# Altium PCB PCB1.PcbDoc (part 2 of 3)
Units mil, origin at the board's own origin, x right, y up, seen from the top; angles counter-clockwise.
Board outline 3051.58 x 3543.22 mil, 2 copper layers (Top Layer, Bottom Layer), stack 22.441 mil thick; 24 components, 24 nets, 64 pads, 1 vias.
Unrouted connection lines stored in the file: 1.
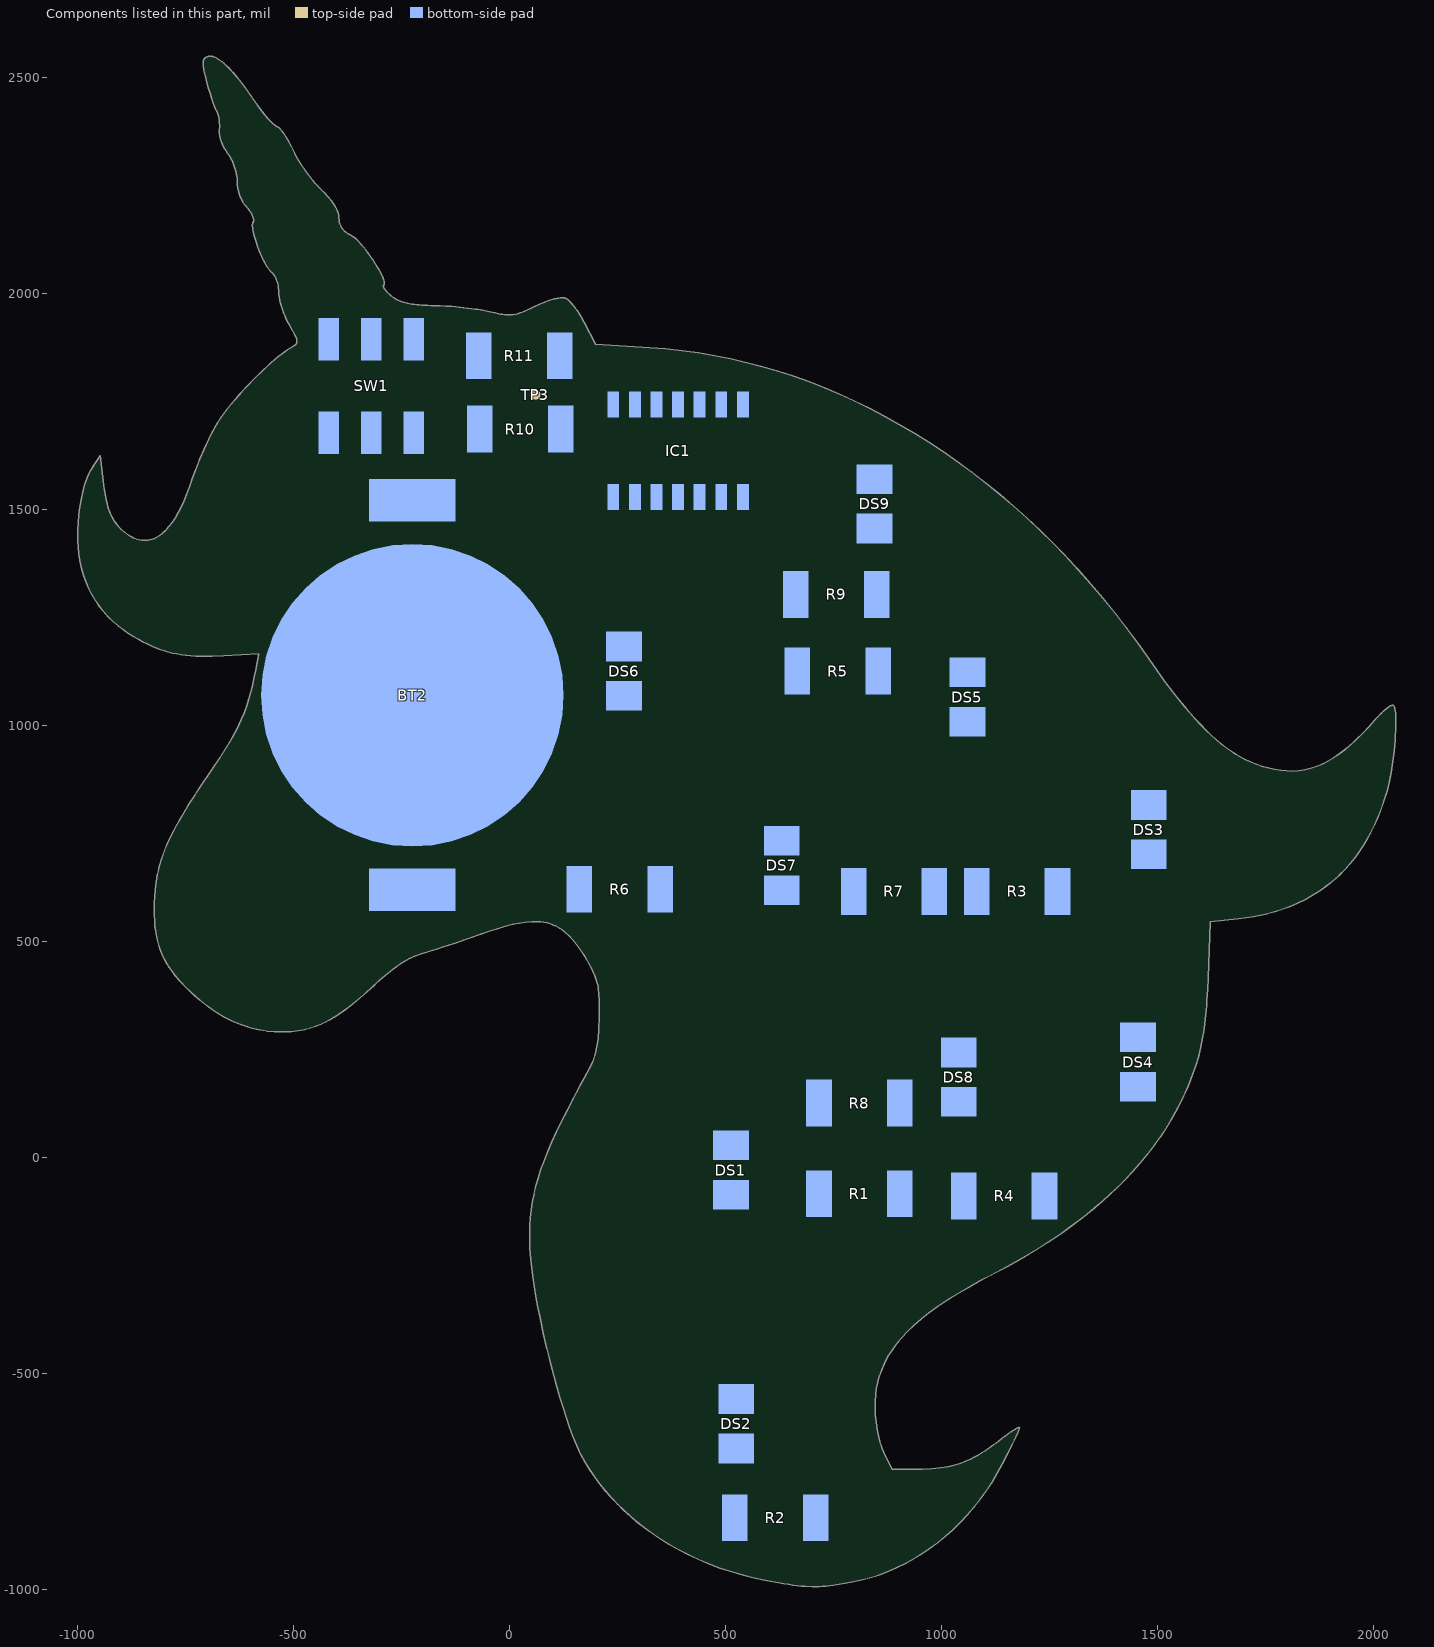
[diagram p2: the components of this part, seen from the top]

## Keep-outs (continued)
Keep-Out Layer: (continued)
  lines w5: -1022.12,1451.07 cw(c-559.53,1440.1) -1014.11,1526.52 ; -1022.12,1451.09 ccw(c-594.89,1440.62) -1021.99,1425.78 ; -1021.99,1425.72 cw(c-594.89,1440.62) -1021.99,1425.78 ; -1021.99,1425.83 ccw(c-699.74,1435.47) -1021.99,1425.78 ; -1011.57,1354.18 cw(c-699.04,1437.68) -1011.6,1354.28 ; -1008.84,1549.87 cw(c-732.99,1478.26) -1002.32,1571.42 ; -1008.83,1549.89 ccw(c-652.64,1457.14) -1014.1,1526.57 ; -1002.3,1571.49 ccw(c-732.99,1478.26) -1002.32,1571.42 ; -994.43,1590.94 cw(c-875.55,1535.81) -994.4,1591.01 ; -945.61,1235.41 cw(c-750.75,1421.33) -1011.6,1354.28 ; -945.51,1235.3 ccw(c-737.38,1436.47) -891.42,1191.41 ; -913.08,1532.36 cw(c-496.04,1611.68) -913.09,1532.41 ; -913.09,1532.45 ccw(c-681.6,1577.41) -913.09,1532.41 ; -897.83,1487.47 ccw(c-826.35,1529.77) -897.8,1487.42 ; -897.76,1487.36 cw(c-817.86,1534.02) -897.8,1487.42 ; -891.47,1191.44 ccw(c-627.19,1607.05) -891.42,1191.41 ; -891.37,1191.37 cw(c-737.38,1436.47) -891.42,1191.41 ; -849.53,1167.75 ccw(c-718.48,1432.89) -849.47,1167.72 ; -843.69,604.28 cw(c-410.51,578.85) -843.69,604.38 ; -843.68,604.47 ccw(c-284.68,566.89) -843.69,604.38 ; -841.6,519.44 ccw(c-619.51,550.17) -841.58,519.34 ; -841.57,519.27 cw(c-540.21,563.31) -841.58,519.34 ; -811.64,737.33 cw(c-331.32,520.03) -811.62,737.37 ; -811.58,737.47 ccw(c-495.86,591.97) -811.62,737.37 ; -780.52,1514.94 ccw(c-1155.89,1697.89) -780.48,1515.03 ; -752.74,364.92 ccw(c-413.55,727.02) -752.68,364.87 ; -752.6,364.79 cw(c-480.25,660.34) -752.68,364.87 ; -744.16,1608.67 cw(c14.63,1311.1) -737.72,1624.6 ; -744.15,1608.7 ccw(c-150.62,1374.93) -755.4,1577.81 ; -735.61,868.1 -735.58,868.14 ; -731.96,2533.57 cw(c-686.9,2532.71) -730.88,2542.53 ; -731.96,2533.63 ccw(c-663.96,2532.16) -731.61,2525.14 ; -731.6,2525.1 cw(c-663.96,2532.16) -731.61,2525.14 ; -730.38,2516.36 ccw(c-510.81,2555.37) -728.42,2506.59 ccw(c-706.46,2511.52) -728.4,2506.52 ccw(c-100.56,2649.39) -722.42,2482.4 ; -730.37,2516.33 cw(c-614.23,2537.13) -731.61,2525.14 ; -727.3,2551.98 ccw(c-696.1,2534.75) -730.85,2542.66 ; -727.02,2552.47 cw(c-696.89,2534.82) -713.24,2565.68 cw(c-689.08,2521.22) -706.78,2568.62 cw(c-698.91,2547.54) -705.84,2568.95 cw(c-692.6,2528.07) -676.46,2567.89 cw(c-701.84,2499.84) -664.4,2562.07 ; -722.43,2482.44 ccw(c-41.93,2662.29) -722.42,2482.4 ; -722.41,2482.36 cw(c-100.56,2649.39) -722.42,2482.4 ; -695.19,2402.61 cw(c-771.52,2388.04) -695.18,2402.56 ; -695.17,2402.52 ccw(c-743.6,2393.05) -695.18,2402.56 ; -688.14,1722.4 ccw(c-479.08,1582.02) -694.95,1711.69 ccw(c-360.11,1510.21) -701.96,1699.55 ccw(c-225.24,1435.27) -709.16,1686.13 ccw(c-94.69,1367.42) -716.41,1671.74 ; -688,1722.61 cw(c-289.07,1448.15) -659.61,1759.88 ; -685.83,2336.8 cw(c-569.06,2385.4) -690.87,2351.36 cw(c-669.2,2357.41) -690.88,2351.37 cw(c-585.14,2380.83) -692.66,2358.74 cw(c-601.09,2377.59) -693.87,2366.12 cw(c-618.21,2375.51) -694.43,2373.57 cw(c-634.09,2375.15) -694.15,2381.1 ; -685.85,2336.84 ccw(c-568.14,2385.56) -679.02,2322.83 ; -679.03,2322.85 ccw(c-587.34,2374.47) -679.02,2322.83 ; -679,2322.81 cw(c-568.14,2385.56) -679.02,2322.83 ; -674.28,960.62 cw(c-1763.43,1637.33) -674.32,960.57 ; -670.36,2309.83 cw(c-587.34,2374.47) -670.41,2309.89 ; -664.42,2562.08 cw(c-722.57,2464.88) -664.4,2562.07 ; -664.36,2562.05 ccw(c-701.84,2499.84) -664.4,2562.07 ; -660.46,1137.52 cw(c-700.61,1786.18) -660.54,1137.52 ; -659.64,1759.84 cw(c-44.61,1248.03) -659.61,1759.88 ; -659.56,1759.94 ccw(c-289.07,1448.15) -659.61,1759.88 ; -654.97,2274.32 ccw(c-761.01,2250.75) -654.99,2274.4 ; -652.46,2553.84 cw(c-760.37,2416.53) -652.4,2553.8 ; -645.68,2218.45 cw(c-533.15,2259.99) -645.69,2218.49 ; -645.71,2218.54 ccw(c-536.25,2258.42) -645.69,2218.49 ; -641.52,1021.76 cw(c-1006,1182.28) -641.55,1021.69 ; -640.42,2543.47 ccw(c-760.37,2416.53) -640.48,2543.52 ; -634.99,2196.67 ccw(c-559.24,2244.66) -625.2,2183.92 ; -634.95,2196.6 cw(c-546.66,2252.98) -639.04,2203.6 ; -624.25,1799.72 cw(c82.93,1134.93) -624.2,1799.77 ; -618.43,2175.14 cw(c-654.64,2152.63) -618.4,2175.1 ; -616.74,2144.66 ccw(c-464.65,2167.84) -616.73,2144.57 ; -616.71,2144.47 cw(c-541.67,2156.55) -616.73,2144.57 ; -613.83,2130.22 ccw(c-369.48,2191.28) -613.82,2130.18 ; -613.82,2130.17 cw(c-464.65,2167.84) -613.82,2130.18 ; -597.3,2082.4 cw(c-278.65,2220.33) -609.42,2114.7 ; -597.32,2082.43 ccw(c-311.56,2205.67) -590.12,2066.92 ; -590.13,2066.94 ccw(c-389.28,2166.67) -582.61,2053.05 ccw(c-501.29,2097.72) -565.19,2030.46 ; -559.97,2020.9 ccw(c-606.7,2004.81) -559.99,2020.95 ; -556.64,2001.68 ccw(c-476.31,2002.08) -556.64,2001.61 ; -556.2,1993.71 cw(c-476.31,2002.08) -556.64,2001.61 ; -556.21,1993.74 ccw(c-440.62,2005.68) -555.08,1985.63 ccw(c-399.8,2012.72) -553.4,1977.34 ; -553.39,1977.27 cw(c-399.8,2012.72) -553.4,1977.34 ; -551.18,1968.58 ccw(c-304.6,2037.82) -551.16,1968.51 ; -549.93,1870.19 cw(c-340.55,1614.57) -549.88,1870.23 ; -538.32,1933.09 ccw(c-345.97,2018.87) -538.31,1933.07 ; -535.26,2411.35 ccw(c-483.75,2463.58) -535.2,2411.29 ; -533.62,1882.72 cw(c-436.25,1748.45) -533.57,1882.76 ; -527.42,267.09 cw(c-528,561.62) -527.48,267.09 ; -523.51,1904.83 -523.56,1904.92 ; -518.82,1896.12 cw(c-619.53,1843.32) -518.78,1896.04 ; -504.2,267.95 ccw(c-520.23,496.82) -504.13,267.95 ; -504.08,267.96 cw(c-526.98,571.51) -504.13,267.95 ; -502.28,2379.69 cw(c-672.93,2262) -497.49,2372.43 cw(c-702.59,2243.25) -492.79,2364.65 ; -502.27,2379.68 ccw(c-638.65,2285.71) -507.11,2386.34 ccw(c-604.22,2312.14) -511.97,2392.31 ; -479.73,2339 ccw(c-318.54,2411.57) -479.71,2338.95 ; -479.68,2338.88 ccw(c-726.26,2229.62) -479.71,2338.95 ; -433.72,2269.95 cw(c-166.24,2500.78) -433.78,2270.01 ; -421.02,2256.53 cw(c-610.51,2056.54) -420.98,2256.5 ; -420.96,2256.48 cw(c-304.35,2378.66) -420.98,2256.5 ; -381.93,2207.83 cw(c-472.07,2159.94) -381.9,2207.76 ; -378.05,2199.67 ccw(c-472.07,2159.94) -381.9,2207.76 ; -378.05,2199.68 cw(c-454.08,2167.51) -375.05,2191.36 ; -375.05,2191.38 cw(c-439.48,2171.89) -373.06,2182.8 ; -371.79,2168.46 ccw(c-355.36,2172.01) -371.78,2168.42 ; -371.77,2168.37 cw(c-347.25,2173.56) -371.78,2168.42 ; -320.79,2121.07 cw(c-600.68,1890.67) -308.63,2105.45 cw(c-326.75,2092.11) -308.61,2105.42 ; -320.77,2121.05 ccw(c-518.1,1959.08) -332.79,2134.68 ccw(c-404.69,2071.19) -357.83,2154.88 ccw(c-368.83,2135.25) -359.52,2155.74 cw(c-343.15,2191.79) -362.68,2157.34 ; -308.65,2105.48 cw(c-628.68,1869.27) -308.61,2105.42 ; -299,380.4 cw(c-918.63,1040.18) -299.04,380.36 ; -285.87,392.33 cw(c103.09,-46.18) -285.82,392.37 ; -278.02,2056.57 cw(c-407.85,1990.43) -277.98,2056.5 ; -266.87,2017.6 ccw(c-218.16,2064.05) -266.82,2017.54 ; -238.68,2000.23 ccw(c-210.29,2098.53) -238.59,2000.2 ; -194.48,450.18 ccw(c-164.36,338.04) -194.49,450.17 ; -146.24,1992.61 cw(c-192.89,1208.18) -132.06,1991.64 ; -146.2,1992.61 ccw(c-182.73,1392.65) -173.07,1993.65 ; -132.08,1991.64 cw(c-195.33,1168.15) -76.05,1985.41 cw(c-79.3,1963.15) -76.01,1985.4 cw(c-158.47,1428.39) -63.36,1983.38 cw(c-132.48,1579.33) -51.71,1981.22 cw(c-104.53,1717.59) -41.21,1978.9 ; -17.15,1973.57 ccw(c4.77,2093.73) -17.09,1973.56 ; -17,1973.54 cw(c58.34,2371.55) -17.09,1973.56 ; 10.01,1973.28 ccw(c-7.42,2045.1) 16.9,1975.31 ccw(c-27.98,2104.05) 25.4,1978.6 ; 10.04,1973.29 cw(c-1.76,2022.19) 4.2,1972.24 ; 26.46,-238.55 cw(c652.81,-183.06) 26.45,-238.47 cw(c652.81,-183.06) 24.49,-158.35 cw(c46.98,-159.24) 24.5,-158.23 cw(c489.99,-179.05) 27.81,-119.82 ; 26.45,-238.48 ccw(c745.32,-177.08) 31.14,-279.47 ; 44.75,-41.83 ccw(c500.86,-181.73) 44.74,-41.88 ; 102.58,2009.27 cw(c132.06,1881.7) 110.52,2010.85 cw(c125.29,1922.81) 118.12,2011.79 ; 102.59,2009.28 ccw(c142.48,1836.1) 94.26,2007.14 ccw(c154.78,1792.16) 85.57,2004.5 ccw(c92.54,1983.11) 85.52,2004.49 ccw(c174.51,1733.57) 48.77,1989.51 ; 118.15,2011.8 ccw(c125.29,1922.81) 118.12,2011.79 ; 125.68,2011.92 cw(c124.03,1974.48) 125.81,2011.91 ; 125.87,2011.91 ccw(c122.87,1954.5) 125.81,2011.91 ; 155.62,1996.27 cw(c63.34,1905.23) 161.13,1990.32 ; 155.64,1996.24 ccw(c92.7,1934.33) 150.27,2001.26 ccw(c119.93,1967.64) 136.56,2009.77 ccw(c128.3,1988.84) 134.7,2010.41 ccw(c124.03,1974.48) 125.81,2011.91 ; 161.12,1990.33 cw(c28.37,1874.66) 166.62,1983.7 cw(c-6.9,1846.73) 172.11,1976.44 ; 169.45,224.8 ccw(c20.45,290.1) 169.46,224.83 ; 169.48,224.88 cw(c-50.46,322.32) 169.46,224.83 ; 173.21,234.16 ccw(c23.35,288.38) 173.23,234.21 ; 173.23,234.23 cw(c20.45,290.1) 173.23,234.21 ; 180.89,264.33 cw(c23.35,288.38) 180.88,264.24 ; 181.92,394.06 ccw(c73.13,371.09) 181.91,394.08 ; 181.9,394.15 cw(c56.13,368.16) 181.91,394.08 ; 185.22,359.22 ccw(c-129.95,352.38) 185.22,359.23 ; 185.22,359.3 cw(c-637.73,344.43) 185.22,359.23 ; 373.49,-924.81 cw(c682.3,-368.75) 281.49,-862.63 cw(c640.35,-420.19) 204.55,-787.09 cw(c592.91,-460.09) 145.35,-699.76 cw(c165.19,-689.14) 145.05,-699.17 cw(c607.54,-468.74) 117.16,-631.61 cw(c1388.74,-189.01) 102.54,-587.13 cw(c1955.3,-12.59) 87.89,-537.55 cw(c2375.35,106.19) 73.7,-484.83 cw(c2429.48,121.54) 48.63,-377.37 ; 373.53,-924.83 ccw(c720.86,-295.83) 592.49,-1002.8 ; 682.39,-1016.3 ccw(c706.17,-718.2) 717.37,-1017.04 ; 682.43,-1016.31 cw(c715.46,-593.65) 663.57,-1014.41 cw(c744.86,-355.12) 642.84,-1011.52 cw(c829.24,189.68) 619.41,-1007.65 ; 717.42,-1017.04 ccw(c705.01,-702.92) 734.75,-1015.87 ccw(c694.97,-598.91) 752.83,-1013.75 ccw(c749.72,-991.47) 752.93,-1013.74 ccw(c618.73,-79.87) 794.31,-1006.85 ; 794.25,-1006.86 ccw(c707.79,-542.32) 794.31,-1006.85 ; 843.18,1753.5 cw(c131.36,343.58) 843.24,1753.47 ; 843.29,1753.44 ccw(c239.14,572.97) 843.24,1753.47 ; 876.47,-642.84 cw(c1172.51,-574.64) 876.46,-642.79 ; 876.45,-642.75 ccw(c1094.14,-591.61) 876.46,-642.79 ; 886.76,-673.74 cw(c968.82,-633.86) 886.75,-673.72 ; 887.39,-489.1 cw(c1081.58,-580.43) 887.42,-489.03 ; 887.44,-488.99 ccw(c1070.68,-573.99) 887.42,-489.03 ; 994.07,-697.48 ccw(c966.78,-471.85) 994.11,-697.47 ; 994.18,-697.46 cw(c953.25,-344.79) 994.11,-697.47 ; 1024.87,-350.51 cw(c1636.5,-1306.42) 1024.94,-350.47 ; 1026.61,-690.99 ccw(c973.73,-508.38) 1026.67,-690.97 ; 1056.97,-679.3 cw(c973.73,-508.38) 1056.91,-679.33 ; 1146.03,-618.98 cw(c1292.5,-830.79) 1151.81,-615.1 cw(c1251.11,-767.2) 1157.14,-611.75 ; 1146.04,-618.97 ccw(c1336.14,-894.03) 1139.86,-623.35 ; 1162.07,-608.92 cw(c1194.11,-667.92) 1162.09,-608.92 ; 1166.82,-606.59 cw(c1182.41,-641.07) 1166.93,-606.53 ; 1167,-606.5 ccw(c1194.11,-667.92) 1166.93,-606.53 ; 1184.82,-604.16 ccw(c1179.43,-629.08) 1172.49,-604.55 ccw(c1182.41,-641.07) 1166.93,-606.53 ; 1186.3,-604.53 cw(c1179.86,-626.86) 1203.1,-626.86 cw(c1179.86,-626.86) 1202.99,-629.05 ; 1202.68,-631.2 cw(c1154.64,-621.91) 1199.2,-642.14 cw(c981.58,-553.03) 1196.71,-647.98 ; 1267.92,-210.29 ccw(c611.67,779.82) 1330.81,-165.61 ccw(c699.35,664.58) 1388.07,-118.76 ; 1267.93,-210.29 cw(c516.23,923.73) 1199.45,-252.82 cw(c414.44,1098.92) 1125.41,-293.19 ; 1303.21,1407.27 ccw(c8.92,180.9) 1083.13,1604.02 ccw(c131.36,343.58) 843.24,1753.47 ; 1303.21,1407.28 cw(c-141.95,37.38) 1498.02,1166.8 ; 1388.08,-118.75 ccw(c778.15,574.96) 1439.67,-69.74 ccw(c875.63,482.19) 1525.66,34.72 ; 1554.37,1089.2 cw(c3006.54,2202.82) 1554.34,1089.23 ; 1689.51,529.26 ccw(c1627.82,1082.06) 1743.66,538.02 ; 1689.54,529.26 1644.21,524.13 1639.79,413.38 cw(c-47.23,478.84) 1636.99,361.69 ; 1793.89,551.66 ccw(c1677.37,911.14) 1793.99,551.69 ; 1794.05,551.71 cw(c1645.57,998.62) 1793.99,551.69 ; 1812.7,916.03 ccw(c1807.95,1066.81) 1812.77,916.03 ; 1812.86,916.04 cw(c1808.95,1076.63) 1812.77,916.03 ; 1986.84,1026.97 cw(c2211.82,830.53) 1986.89,1027.03 ; 1986.94,695.92 ccw(c1631.19,938.83) 1986.96,695.96 ; 1999.33,1040.42 ccw(c2211.82,830.53) 1986.89,1027.03 ; 1999.34,1040.43 cw(c2175.59,866.14) 2005.4,1046.36 cw(c2144.07,899.59) 2011.28,1051.69 ; 2011.27,1051.69 cw(c2111.6,936.88) 2016.95,1056.41 ; 2013.1,739.58 cw(c1631.19,938.83) 1986.96,695.96 ; 2013.15,739.67 ccw(c1529.25,989.24) 2053.17,841.08 ; 2022.44,1060.49 cw(c2061.79,1003.93) 2022.51,1060.53 ; 2028,1063.97 cw(c2049.38,1026.33) 2028.06,1064.01 ; 2028.11,1064.03 ccw(c2061.79,1003.93) 2028.06,1064.01 ; 2034.59,1067.02 ccw(c2049.38,1026.33) 2034.45,1066.96 ; 2044.08,1068.82 cw(c2044.77,1044.07) 2044.33,1068.83 ; 2044.42,1068.83 ccw(c2044.8,1039.29) 2044.33,1068.83 ; 2053.16,841.03 ccw(c1723.25,935.26) 2058.55,862.49 ; 2058.54,862.47 ccw(c1527.49,978.41) 2063.19,886.3 ; 2063.2,886.34 ccw(c1253.62,1024) 2072.56,963.11 ccw(c1383.46,1014.94) 2073.95,987.25 ; 2074.34,1009 ccw(c2051.84,1009) 2074.34,1009.07 ccw(c1815.28,1008.29) 2074.34,1009.09 ; -1021.99,1425.78 ccw(c-699.74,1435.47) -1016.93,1377.74 ccw(c-994.79,1381.77) -1016.9,1377.59 ccw(c-699.04,1437.68) -1011.6,1354.28 ; -1014.11,1526.52 cw(c-992.01,1522.32) -1014.1,1526.57 ; -1014.11,1526.52 cw(c-992.01,1522.32) -1014.1,1526.57 ; -1002.32,1571.42 cw(c-981.04,1564.13) -1002.31,1571.46 cw(c-811.79,1505.78) -994.41,1590.99 ; -994.4,1591.01 ccw(c-974.02,1581.48) -994.41,1590.99 ; -994.4,1591.01 cw(c-875.55,1535.81) -984.89,1608.04 ; -984.89,1608.04 cw(c-966.09,1595.69) -984.76,1608.24 ; -984.89,1608.04 cw(c-875.55,1535.81) -984.85,1608.1 cw(c-966.09,1595.69) -984.76,1608.24 ; -984.76,1608.24 -965.81,1636.43 ; -965.81,1636.43 cw(c-947.14,1623.87) -924.77,1626.31 ; -965.81,1636.43 cw(c-947.14,1623.87) -924.77,1626.35 -924.77,1626.31 ; -924.77,1626.31 -918.21,1567.18 ; -918.2,1567.03 ccw(c-940.57,1564.66) -918.21,1567.14 -918.21,1567.18 ; -918.2,1567.03 ccw(c-496.04,1611.68) -913.09,1532.41 ; -918.2,1567.03 ccw(c-940.57,1564.66) -918.21,1567.18 ; -913.09,1532.41 ccw(c-681.6,1577.41) -909.94,1518.47 ; -909.94,1518.47 ccw(c-681.6,1577.41) -909.92,1518.41 ; -909.94,1518.47 cw(c-931.7,1512.78) -909.92,1518.41 ; -909.9,1518.35 ccw(c-931.7,1512.78) -909.92,1518.41 ; -909.9,1518.35 ccw(c-750.94,1559.47) -906.33,1506.42 ; -909.9,1518.35 cw(c-750.94,1559.47) -909.92,1518.41 ; -906.33,1506.42 ccw(c-750.94,1559.47) -906.31,1506.36 ; -906.33,1506.42 cw(c-927.6,1499.08) -906.31,1506.36 ; -906.29,1506.3 ccw(c-927.6,1499.08) -906.31,1506.36 ; -906.29,1506.3 ccw(c-793.47,1544.93) -902.26,1496.1 ccw(c-817.86,1534.02) -897.8,1487.42 ; -906.29,1506.3 cw(c-793.47,1544.93) -906.31,1506.36 ; -897.8,1487.42 ccw(c-826.35,1529.77) -872.76,1460.89 ; -891.42,1191.41 ccw(c-627.19,1607.05) -870.3,1178.71 ; -872.76,1460.89 cw(c-885.34,1442.23) -871.83,1460.23 ; -872.76,1460.89 cw(c-885.34,1442.23) -871.88,1460.26 ccw(c-839.15,1504.11) -871.83,1460.23 ; -871.83,1460.23 ccw(c-839.15,1504.11) -848.08,1450.13 ccw(c-844.28,1482.11) -829.44,1453.52 ; -870.3,1178.71 ccw(c-859.19,1198.28) -870.3,1178.71 ; -870.3,1178.71 ccw(c-680.49,1513.17) -849.47,1167.72 ; -849.47,1167.72 ccw(c-718.48,1432.89) -785.82,1144.9 ccw(c-780.7,1166.81) -785.76,1144.88 ccw(c-717.3,1440.99) -763.33,1140.58 ; -849.47,1167.72 ccw(c-680.49,1513.17) -849.45,1167.71 ; -844.27,545.76 cw(c-443.95,568.86) -844.27,545.83 ; -844.27,545.76 cw(c-821.8,547.06) -844.27,545.83 ; -844.27,545.76 ccw(c-540.21,563.31) -841.58,519.34 ; -844.27,545.83 cw(c-443.95,568.86) -844.9,574.05 cw(c-284.68,566.89) -843.69,604.38 ; -843.69,604.38 cw(c-410.51,578.85) -837.12,658.21 cw(c-815,654.1) -837.09,658.4 cw(c-495.86,591.97) -811.62,737.37 ; -841.58,519.34 ccw(c-619.51,550.17) -819.11,448.06 ccw(c-799.08,458.31) -819.06,447.97 ccw(c-613.69,554.2) -806.39,426.42 ; -829.44,1453.52 cw(c-819,1433.59) -829.27,1453.61 ; -829.44,1453.52 ccw(c-844.28,1482.11) -829.4,1453.55 cw(c-819,1433.59) -829.27,1453.61 ; -829.27,1453.61 ccw(c-854.8,1503.4) -818.27,1461.02 ; -818.27,1461.02 cw(c-803.58,1443.98) -818.21,1461.07 ; -818.27,1461.02 cw(c-803.58,1443.98) -818.26,1461.03 ccw(c-881.88,1534.93) -818.21,1461.07 ; -818.21,1461.07 ccw(c-881.88,1534.93) -806.16,1473.49 ; -811.62,737.37 cw(c-331.32,520.03) -797.77,765.7 ; -806.39,426.42 ccw(c-787.64,438.85) -806.39,426.41 ; -806.39,426.41 ccw(c-579.88,576.76) -791.11,405.61 ccw(c-773.63,419.77) -791.03,405.51 ccw(c-480.25,660.34) -752.68,364.87 ; -806.16,1473.49 cw(c-788.64,1459.37) -806.1,1473.56 ; -806.16,1473.49 ccw(c-881.88,1534.93) -806.12,1473.53 ; -806.1,1473.56 ccw(c-935.38,1578.61) -806.06,1473.61 ; -806.12,1473.53 cw(c-788.64,1459.37) -806.06,1473.61 ; -806.06,1473.61 ccw(c-935.38,1578.61) -793.39,1491.51 ; -797.77,765.7 cw(c-119.38,408.48) -797.74,765.76 ; -797.77,765.7 cw(c-777.86,755.21) -797.74,765.76 ; -797.74,765.76 cw(c-119.38,408.48) -780.72,796.36 cw(c255.95,188.64) -760.15,830.16 cw(c935.25,-239.68) -735.69,867.97 cw(c-716.94,855.54) -735.58,868.14 ; -793.39,1491.51 cw(c-774.21,1479.74) -793.34,1491.58 ; -793.39,1491.51 cw(c-774.21,1479.74) -793.38,1491.53 ccw(c-1023.96,1633.34) -793.34,1491.58 ; -793.34,1491.58 ccw(c-1023.96,1633.34) -780.53,1514.93 cw(c-760.29,1505.09) -780.48,1515.03 ; -780.48,1515.03 ccw(c-1155.89,1697.89) -767.85,1543.62 ; -767.85,1543.62 cw(c-746.91,1535.4) -767.82,1543.71 ; -767.85,1543.62 ccw(c-1155.89,1697.89) -767.82,1543.7 ; -767.82,1543.71 ccw(c-1338.92,1770.98) -755.45,1577.67 ; -763.33,1140.58 ccw(c-759.92,1162.82) -763.33,1140.58 ; -763.33,1140.58 ccw(c-710.72,1484.51) -739.89,1137.8 ccw(c-704.15,1563.22) -715.16,1136.45 ccw(c-714.58,1158.94) -715.08,1136.44 ccw(c-700.61,1786.18) -660.54,1137.52 ; -755.45,1577.67 cw(c-734.07,1570.66) -755.4,1577.81 ; -755.45,1577.67 ccw(c-1338.92,1770.98) -755.43,1577.73 cw(c-734.07,1570.66) -755.4,1577.81 ; -752.68,364.87 ccw(c-413.55,727.02) -731.75,346.35 ; -737.72,1624.6 cw(c-716.92,1616) -737.69,1624.65 ; -737.72,1624.6 cw(c14.63,1311.1) -737.69,1624.66 ; -737.69,1624.65 cw(c58,1293.35) -716.45,1671.66 ; -735.58,868.14 -707.06,910.52 ; -731.75,346.35 ccw(c-717.32,363.61) -731.7,346.3 ; -731.75,346.35 ccw(c-455.04,677.38) -731.7,346.3 ; -731.7,346.3 ccw(c-455.04,677.38) -710.54,329.71 ccw(c-485.07,636.53) -689.15,315.09 ccw(c-528,561.62) -527.48,267.09 ; -731.61,2525.15 ccw(c-614.23,2537.13) -731.61,2525.14 ; -730.88,2542.53 cw(c-708.92,2537.63) -730.85,2542.66 ; -730.88,2542.56 cw(c-696.1,2534.75) -730.85,2542.66 ; -722.42,2482.4 ccw(c-41.93,2662.29) -714.75,2455.55 ; -716.45,1671.66 cw(c-696.23,1661.78) -716.41,1671.74 ; -716.44,1671.67 cw(c-94.69,1367.42) -716.41,1671.74 ; -714.75,2455.55 ccw(c-693.24,2462.16) -714.7,2455.4 ; -714.75,2455.55 ccw(c-693.24,2462.16) -714.7,2455.4 ; -714.7,2455.4 -712.14,2447.25 ; -712.14,2447.25 ccw(c-690.67,2454) -712.03,2446.91 ; -712.14,2447.25 ccw(c-690.67,2454) -712.04,2446.95 -712.03,2446.91 ; -712.03,2446.91 -709.51,2439.3 ; -709.51,2439.3 ccw(c-688.15,2446.35) -709.46,2439.14 ; -709.51,2439.3 ccw(c-688.15,2446.35) -709.46,2439.14 ; -709.46,2439.14 ccw(c-289.7,2581.22) -706.89,2431.76 ccw(c-408.27,2538.68) -704.41,2425.06 ccw(c-515.04,2497.6) -702.09,2419.27 ccw(c-628.2,2449.07) -697.26,2409.36 ccw(c-677.76,2420.57) -696.98,2408.87 ; -707.06,910.52 cw(c-688.39,897.96) -706.89,910.76 ; -707.06,910.52 cw(c-688.39,897.96) -706.93,910.71 ccw(c-1763.43,1637.33) -706.89,910.76 ; -706.89,910.76 ccw(c-1763.43,1637.33) -674.32,960.56 ; -696.98,2408.87 ccw(c-677.76,2420.57) -696.97,2408.86 ; -696.98,2408.87 cw(c-697.11,2408.79) -696.97,2408.86 ; -696.97,2408.86 ccw(c-676.36,2417.9) -696.95,2408.81 cw(c-710.09,2403.01) -696.46,2407.55 ; -696.97,2408.86 ccw(c-676.36,2417.9) -696.97,2408.86 ; -696.97,2408.85 ccw(c-697.11,2408.79) -696.97,2408.86 ; -696.45,2407.52 cw(c-675.11,2414.66) -696.46,2407.55 ; -696.45,2407.52 cw(c-675.11,2414.66) -696.46,2407.55 ; -696.45,2407.52 cw(c-726.36,2397.52) -695.82,2405.4 ; -695.81,2405.34 cw(c-674.01,2410.94) -695.82,2405.4 ; -695.81,2405.34 cw(c-743.6,2393.05) -695.18,2402.56 ; -695.81,2405.35 ccw(c-674.01,2410.94) -695.81,2405.34 ; -695.81,2405.35 ccw(c-726.36,2397.52) -695.82,2405.4 ; -695.18,2402.56 cw(c-771.52,2388.04) -693.81,2388.22 ; -694.15,2381.1 cw(c-634.09,2375.15) -694.15,2381.18 ; -694.15,2381.1 cw(c-671.76,2378.93) -694.14,2381.21 ; -694.14,2381.21 ccw(c-758.72,2387.79) -693.81,2387.79 ccw(c-758.72,2387.79) -693.81,2388.09 ; -693.81,2388.09 cw(c-671.31,2388.27) -693.81,2388.22 ; -693.81,2388.09 ccw(c-758.72,2387.79) -693.81,2388.15 cw(c-671.31,2388.27) -693.81,2388.22 ; -679.02,2322.83 ccw(c-587.34,2374.47) -670.41,2309.89 ; -674.32,960.57 ccw(c-1246.68,1313.96) -661.51,982.2 ; -674.32,960.57 ccw(c-655.17,948.75) -674.32,960.57 ; -670.41,2309.89 ccw(c-652.61,2323.65) -670.32,2309.78 cw(c-708.57,2279.83) -667.84,2306.3 ; -667.84,2306.3 ccw(c-648.97,2318.57) -667.8,2306.25 ; -667.84,2306.3 ccw(c-648.97,2318.57) -667.83,2306.29 ; -667.83,2306.29 cw(c-725.34,2268.87) -667.8,2306.25 ; -667.8,2306.25 cw(c-725.34,2268.87) -665.28,2302.05 ; -665.28,2302.05 ccw(c-645.55,2312.86) -665.25,2301.99 ; -665.28,2302.05 cw(c-725.34,2268.87) -665.26,2302 ; -665.26,2302 ccw(c-645.55,2312.86) -665.25,2301.99 ; -665.25,2301.99 cw(c-741.8,2259.74) -662.73,2297.05 ; -664.4,2562.07 cw(c-722.57,2464.88) -652.42,2553.82 ; -662.73,2297.05 ccw(c-642.38,2306.66) -662.7,2296.99 ; -662.73,2297.07 cw(c-759.52,2251.49) -662.7,2296.99 ; -662.7,2296.99 cw(c-759.52,2251.49) -658.27,2286.02 ; -661.51,982.2 cw(c-641.94,971.1) -661.48,982.25 ; -661.51,982.2 ccw(c-1088.24,1224.07) -661.48,982.25 ; -661.48,982.25 ccw(c-1088.24,1224.07) -650.69,1002.39 ; -660.54,1137.52 -608.14,1140.52 -610.05,1130.66 ; -660.56,1137.52 -660.54,1137.52 ; -659.61,1759.88 cw(c-44.61,1248.03) -642.58,1779.67 ; -658.23,2285.93 cw(c-636.95,2293.22) -658.27,2286.02 ; -658.25,2285.97 ccw(c-636.95,2293.22) -658.21,2285.87 ; -658.23,2285.93 cw(c-761.01,2250.75) -658.21,2285.87 ; -658.25,2285.97 ccw(c-759.52,2251.49) -658.27,2286.02 ; -658.21,2285.87 cw(c-761.01,2250.75) -654.99,2274.4 ; -654.99,2274.4 ccw(c-633,2279.2) -654.97,2274.33 cw(c-743.78,2254.64) -653.92,2268.78 ; -653.89,2268.62 cw(c-631.69,2272.28) -653.92,2268.78 ; -653.89,2268.62 ccw(c-715.94,2258.62) -653.9,2268.68 cw(c-631.69,2272.28) -653.92,2268.78 ; -653.89,2268.62 cw(c-715.94,2258.62) -653.09,2259.04 ; -653.09,2259 cw(c-630.59,2259.19) -653.09,2259.04 ; -653.09,2259 cw(c-630.59,2259.19) -653.09,2259.04 ; -653.09,2259 ccw(c-533.15,2259.99) -645.69,2218.49 ; -652.4,2553.8 cw(c-760.37,2416.53) -640.48,2543.52 ; -652.4,2553.8 ccw(c-666.36,2536.15) -652.42,2553.82 ; -650.69,1002.39 cw(c-630.61,992.22) -650.66,1002.44 ; -650.69,1002.38 ccw(c-1006,1182.28) -650.66,1002.44 ; -650.66,1002.44 ccw(c-1006,1182.28) -641.55,1021.69 ; -645.69,2218.49 ccw(c-536.25,2258.42) -639.05,2203.62 ; -642.58,1779.67 cw(c-44.61,1248.03) -642.54,1779.72 ; -642.58,1779.67 cw(c-625.72,1764.77) -642.54,1779.71 ; -642.54,1779.71 cw(c66.95,1149.17) -624.24,1799.73 cw(c-607.85,1784.31) -624.2,1799.77 ; -641.55,1021.7 ccw(c-1001.54,1178.91) -620.91,1081.81 ; -640.48,2543.52 cw(c-655.88,2527.11) -640.44,2543.48 cw(c-818.06,2355.14) -628.09,2531.01 ; -639.05,2203.62 ccw(c-619.2,2214.21) -639.04,2203.6 ; -628.09,2531.02 cw(c-896.83,2281.93) -628.05,2530.97 ; -628.09,2531.01 cw(c-644.6,2515.73) -628.05,2530.97 ; -628.05,2530.97 cw(c-896.83,2281.93) -615.34,2516.51 ; -625.2,2183.92 ccw(c-608.61,2199.12) -625.08,2183.78 ; -625.2,2183.92 ccw(c-559.24,2244.66) -625.15,2183.86 ccw(c-608.61,2199.12) -625.08,2183.78 ; -625.08,2183.78 cw(c-668.16,2143.64) -622.57,2180.91 ; -624.2,1799.77 cw(c82.93,1134.93) -586.23,1837.97 ; -622.57,2180.91 ccw(c-605.15,2195.15) -622.55,2180.89 ; -622.57,2180.91 ccw(c-605.15,2195.15) -622.52,2180.85 ; -622.55,2180.89 cw(c-664.91,2146.16) -622.52,2180.85 ; -622.52,2180.85 cw(c-664.91,2146.16) -618.42,2175.12 ; -620.91,1081.81 cw(c-599.11,1076.25) -620.87,1081.98 ; -620.91,1081.81 cw(c-599.11,1076.24) -620.88,1081.91 ccw(c-1228.38,1240.05) -620.87,1081.98 ; -620.87,1081.98 ccw(c-1228.38,1240.05) -615.37,1104.87 ; -618.42,2175.12 ccw(c-599.32,2187.02) -618.4,2175.1 ; -618.4,2175.1 cw(c-654.64,2152.63) -616.96,2172.58 ; -616.96,2172.58 ccw(c-597.02,2183) -616.92,2172.5 ; -616.96,2172.58 cw(c-654.64,2152.63) -616.92,2172.51 ; -616.92,2172.5 cw(c-644.36,2158.01) -615.84,2170.24 ; -616.73,2144.57 ccw(c-464.65,2167.84) -613.82,2130.18 ; -616.73,2144.57 cw(c-541.67,2156.55) -617.67,2158 cw(c-581.74,2157.98) -615.66,2169.81 ccw(c-632.72,2162.97) -615.81,2170.17 ; -615.84,2170.24 ccw(c-595.16,2179.11) -615.81,2170.17 ; -615.83,2170.23 cw(c-632.72,2162.97) -615.81,2170.17 ; -615.37,1104.87 ccw(c-1228.38,1240.05) -615.35,1104.96 ; -615.37,1104.87 cw(c-593.37,1100.12) -615.35,1104.96 ; -615.35,1104.96 ccw(c-1551.7,1311.32) -610.07,1130.57 ; -615.35,1104.96 ccw(c-593.37,1100.12) -615.35,1104.96 ; -615.34,2516.51 cw(c-896.83,2281.93) -615.29,2516.46 ; -615.34,2516.51 cw(c-632.58,2502.05) -615.3,2516.46 ; -615.3,2516.46 cw(c-996.47,2198.68) -602.01,2499.82 cw(c-1114.86,2108.11) -588.26,2481.12 cw(c-1249.5,2012.6) -574.06,2460.4 ; -613.82,2130.18 ccw(c-369.48,2191.28) -609.42,2114.7 ; -610.07,1130.57 cw(c-587.97,1126.33) -610.05,1130.67 ; -610.07,1130.57 cw(c-587.97,1126.33) -610.06,1130.6 -610.05,1130.66 ; -609.42,2114.7 ccw(c-587.98,2121.54) -609.42,2114.7 ; -586.23,1837.97 cw(c-60.76,1285.57) -567.6,1855.11 cw(c-205.87,1449.08) -549.91,1870.21 cw(c-535.67,1852.78) -549.88,1870.23 ; -586.23,1837.97 ccw(c-570.72,1821.67) -586.23,1837.97 ; -574.06,2460.41 ccw(c-231.76,2687.46) -574.02,2460.35 ; -574.06,2460.4 cw(c-592.81,2447.97) -574.02,2460.35 ; -574.02,2460.35 ccw(c-231.76,2687.46) -550.47,2428.34 ; -565.19,2030.46 ccw(c-549.65,2046.73) -564.25,2029.6 ; -565.19,2030.46 ccw(c-501.29,2097.72) -565.14,2030.4 ccw(c-549.65,2046.73) -564.25,2029.6 ; -564.25,2029.6 ccw(c-571.38,2023.68) -564.25,2029.6 ; -564.25,2029.6 cw(c-571.38,2023.68) -563.61,2028.74 ; -564.25,2029.6 ccw(c-549.65,2046.73) -564.24,2029.6 ; -563.6,2028.72 cw(c-544.76,2041.03) -563.61,2028.74 ; -563.6,2028.72 cw(c-582.43,2016.42) -562.49,2026.82 ; -563.6,2028.72 cw(c-544.76,2041.03) -563.61,2028.74 ; -562.48,2026.81 cw(c-594.94,2009.84) -562.45,2026.74 ; -562.49,2026.82 ccw(c-542.54,2037.23) -562.44,2026.74 ; -562.49,2026.82 ccw(c-542.54,2037.23) -562.48,2026.81 ; -562.45,2026.74 cw(c-594.94,2009.84) -561.22,2024.14 ; -561.19,2024.08 cw(c-540.51,2032.93) -561.22,2024.14 ; -561.19,2024.08 ccw(c-606.7,2004.81) -561.22,2024.13 ; -561.19,2024.08 cw(c-606.7,2004.81) -559.99,2020.95 ; -561.22,2024.14 ccw(c-540.51,2032.93) -561.22,2024.13 ; -559.99,2020.95 ccw(c-538.7,2028.22) -559.98,2020.91 cw(c-618.46,2000.82) -557.91,2013.37 ; -557.89,2013.28 cw(c-535.88,2017.94) -557.91,2013.37 ; -557.89,2013.28 cw(c-535.88,2017.94) -557.91,2013.37 ; -557.89,2013.28 cw(c-614.27,2001.33) -556.64,2001.67 ccw(c-534.14,2001.8) -556.64,2001.61 ; -553.4,1977.34 ccw(c-531.46,1982.33) -553.39,1977.28 ccw(c-359.45,2021.96) -551.19,1968.63 ccw(c-529.51,1974.66) -551.16,1968.51 ; -551.16,1968.51 ccw(c-304.6,2037.82) -538.31,1933.07 ; -550.43,2428.28 cw(c-231.76,2687.46) -550.47,2428.34 ; -550.46,2428.32 ccw(c-320.17,2616.37) -544.95,2421.76 ; -550.46,2428.32 ccw(c-567.89,2414.09) -550.47,2428.34 ; -549.88,1870.23 cw(c-340.55,1614.57) -533.57,1882.76 ; -544.95,2421.76 ccw(c-320.17,2616.37) -544.9,2421.72 ; -544.95,2421.76 cw(c-561.91,2406.98) -544.9,2421.71 ; -544.9,2421.72 cw(c-561.91,2406.98) -544.86,2421.66 ; -544.9,2421.71 ccw(c-378.93,2565.39) -544.86,2421.66 ; -544.86,2421.66 ccw(c-378.93,2565.39) -539.84,2416.06 ; -539.84,2416.06 ccw(c-378.93,2565.39) -539.78,2416 cw(c-556.27,2400.69) -539.77,2415.99 ; -539.84,2416.06 cw(c-556.27,2400.69) -539.77,2415.99 ; -539.77,2415.99 ccw(c-436.47,2511.82) -535.28,2411.37 cw(c-551.06,2395.32) -535.2,2411.29 ; -538.31,1933.07 ccw(c-304.6,2037.82) -538.31,1933.05 ; -538.31,1933.07 ccw(c-345.97,2018.87) -529.89,1916.25 ; -535.2,2411.29 ccw(c-483.75,2463.58) -531.74,2408.1 ; -533.57,1882.76 cw(c-436.25,1748.45) -518.62,1892.41 cw(c-507.44,1872.88) -517.93,1892.79 ccw(c-550.31,1954.21) -517.31,1893.12 ccw(c-619.53,1843.32) -518.78,1896.04 ; -533.55,1882.77 ccw(c-340.55,1614.57) -533.57,1882.76 ; -531.74,2408.1 ccw(c-483.75,2463.58) -531.7,2408.06 cw(c-546.4,2391.03) -531.64,2408.01 ; -531.74,2408.1 cw(c-546.4,2391.03) -531.64,2408.01 ; -531.64,2408.01 ccw(c-516.22,2425.75) -529.93,2406.65 ; -529.93,2406.65 ccw(c-516.22,2425.75) -529.92,2406.65 cw(c-539.2,2386.15) -529.78,2406.58 ; -529.93,2406.65 cw(c-539.2,2386.15) -529.78,2406.58 ; -529.89,1916.25 ccw(c-510.24,1927.21) -529.88,1916.24 ; -529.88,1916.24 -523.56,1904.92 ; -529.78,2406.58 cw(c-548.14,2366.8) -516.86,2397.48 cw(c-575.34,2337.39) -512,2392.34 ; -527.48,267.09 ccw(c-526.98,571.51) -504.13,267.95 ; -527.5,267.09 ccw(c-526.98,571.51) -527.48,267.09 ; -523.56,1904.92 ccw(c-503.87,1915.81) -523.54,1904.88 ; -523.54,1904.88 cw(c-857.06,1719.69) -518.84,1896.15 ccw(c-498.89,1906.56) -518.78,1896.04 ; -512.02,2392.36 cw(c-604.22,2312.14) -511.97,2392.31 ; -512,2392.34 cw(c-528.99,2377.59) -511.97,2392.31 ; -504.13,267.95 ccw(c-520.23,496.82) -437.44,282.84 ccw(c-445.56,303.83) -437.39,282.86 ccw(c-527.08,513.03) -415.77,292.51 ; -492.79,2364.64 ccw(c-512.27,2353.38) -492.79,2364.65 ; -492.79,2364.64 cw(c-726.26,2229.62) -479.71,2338.95 ; -479.71,2338.95 ccw(c-318.54,2411.57) -471.7,2323.29 ; -471.7,2323.29 ccw(c-318.54,2411.57) -471.66,2323.24 cw(c-491.16,2312) -471.58,2323.1 ; -471.7,2323.29 cw(c-491.16,2312) -471.62,2323.16 ccw(c-229.17,2461.61) -471.58,2323.1 ; -471.58,2323.1 ccw(c-229.17,2461.61) -466.34,2314.3 ; -466.34,2314.3 ccw(c-183.16,2490.12) -466.3,2314.24 ; -466.34,2314.3 cw(c-485.45,2302.43) -466.3,2314.24 ; -466.34,2314.3 ccw(c-485.45,2302.43) -466.34,2314.3 ; -466.3,2314.24 ccw(c-183.16,2490.12) -460.44,2305.14 ; -460.44,2305.14 cw(c-479.16,2292.65) -460.39,2305.06 ; -460.44,2305.14 cw(c-479.16,2292.65) -460.43,2305.12 ccw(c-166.24,2500.78) -460.39,2305.06 ; -460.39,2305.06 ccw(c-166.24,2500.78) -433.78,2270.01 ; -433.78,2270.01 ccw(c-255.09,2425.33) -427.21,2262.76 ; -427.21,2262.76 ccw(c-255.09,2425.33) -427.17,2262.72 ; -427.21,2262.76 cw(c-443.52,2247.26) -427.16,2262.71 ; -427.16,2262.71 ccw(c-304.35,2378.66) -427.12,2262.66 ; -427.17,2262.72 cw(c-443.52,2247.26) -427.12,2262.66 ; -427.12,2262.66 ccw(c-304.35,2378.66) -420.98,2256.5 ; -420.98,2256.5 cw(c-610.51,2056.54) -405.14,2240.19 cw(c-421.91,2225.19) -405.12,2240.16 cw(c-569.13,2093.92) -398.22,2232.04 cw(c-542.35,2115.53) -392.05,2223.96 cw(c-516.71,2133.99) -386.65,2215.96 ; -415.76,292.51 ccw(c-549.03,556.31) -394.05,304.65 ; -415.77,292.51 ccw(c-425.9,312.6) -415.76,292.51 ; -394.05,304.65 ccw(c-405.85,323.81) -394.05,304.65 ; -394.05,304.65 ccw(c-593.64,628.7) -371.93,319.37 ccw(c-674.84,742.08) -349,336.78 ccw(c-363.1,354.31) -348.94,336.83 ccw(c-918.63,1040.18) -299.04,380.36 ; -386.65,2215.96 cw(c-516.71,2133.99) -386.61,2215.9 ; -386.65,2215.96 cw(c-405.65,2203.91) -386.61,2215.9 ; -386.61,2215.9 cw(c-493.05,2148.84) -381.93,2207.82 cw(c-401.8,2197.27) -381.9,2207.76 ; -373.05,2182.73 ccw(c-395.26,2179.16) -373.06,2182.8 ; -373.05,2182.73 ccw(c-428.38,2173.7) -373.06,2182.81 ; -373.05,2182.73 cw(c-428.38,2173.7) -372.32,2173.99 ; -372.32,2173.82 ccw(c-394.82,2173.82) -372.32,2173.99 ; -372.32,2173.82 cw(c-394.82,2173.82) -372.32,2173.7 ccw(c-347.25,2173.56) -371.78,2168.42 ; -372.32,2173.82 ccw(c-394.82,2173.82) -372.32,2173.91 ccw(c-428.38,2173.7) -372.32,2173.99 ; -371.78,2168.42 ccw(c-355.36,2172.01) -371.24,2166.5 ; -371.24,2166.47 ccw(c-358,2171.14) -367.31,2160.64 ; -371.24,2166.47 cw(c-358,2171.14) -371.24,2166.5 ; -371.24,2166.47 ccw(c-392.49,2159.1) -371.24,2166.49 ; -371.24,2166.5 ccw(c-355.36,2172.01) -371.24,2166.49 ; -371.25,2166.51 ccw(c-358,2171.14) -371.24,2166.5 ; -367.31,2160.64 ccw(c-358,2171.14) -367.26,2160.6 cw(c-382.11,2143.69) -367.14,2160.49 ; -367.31,2160.64 cw(c-382.11,2143.69) -367.14,2160.49 ; -367.14,2160.49 ccw(c-352.35,2177.06) -365.2,2158.94 ; -365.2,2158.94 ccw(c-348.1,2183.07) -365.16,2158.91 ; -365.2,2158.94 cw(c-378.21,2140.59) -365.16,2158.91 ; -365.16,2158.91 ccw(c-348.1,2183.07) -362.68,2157.35 ; -362.68,2157.34 ccw(c-373.78,2137.77) -362.68,2157.35 ; -362.68,2157.34 ccw(c-373.78,2137.77) -362.68,2157.35 ; -308.61,2105.42 cw(c-628.68,1869.27) -286.71,2072.42 ; -299.04,380.36 ccw(c202.67,-158.52) -299.07,380.33 ; -299.04,380.36 cw(c202.67,-158.52) -285.87,392.32 ccw(c-300.8,409.16) -285.82,392.37 ; -286.71,2072.42 cw(c-515.11,1936.83) -277.98,2056.5 ; -286.71,2072.42 ccw(c-306.06,2060.93) -286.71,2072.42 ; -286.71,2072.42 ccw(c-306.06,2060.93) -286.71,2072.42 ; -285.82,392.37 cw(c103.09,-46.18) -273.4,403.08 ; -277.98,2056.5 cw(c-407.85,1990.43) -271.51,2041.85 cw(c-329.61,2019.17) -267.82,2027.66 cw(c-296.91,2022.73) -267.41,2022.73 cw(c-296.91,2022.73) -267.72,2018.5 ccw(c-231.34,2051.51) -266.88,2017.6 cw(c-283.16,2002.07) -266.82,2017.54 ; -273.4,403.08 cw(c103.09,-46.18) -273.35,403.12 ; -273.4,403.08 ccw(c-287.8,420.37) -273.35,403.12 ; -273.35,403.12 cw(c26,45.88) -261.54,412.7 ; -266.82,2017.54 ccw(c-218.16,2064.05) -264.43,2015.16 ; -264.43,2015.16 cw(c-279.89,1998.82) -264.38,2015.12 ; -264.43,2015.16 cw(c-279.89,1998.82) -264.42,2015.16 ccw(c-207.47,2075.3) -264.38,2015.12 ; -264.38,2015.12 ccw(c-207.47,2075.3) -261.58,2012.59 ; -261.58,2012.59 ccw(c-207.47,2075.3) -261.54,2012.55 ; -261.58,2012.59 cw(c-276.23,1995.51) -261.54,2012.55 ; -261.54,412.7 ccw(c-275.36,430.45) -261.48,412.74 ; -261.54,412.7 cw(c26,45.88) -261.48,412.74 ; -261.54,2012.55 ccw(c-200.6,2083.26) -258.3,2009.88 ; -261.48,412.74 ccw(c-275.36,430.45) -261.43,412.78 ; -261.48,412.74 cw(c-32.84,121) -261.43,412.78 ; -261.43,412.78 cw(c-32.84,121) -250.29,421.17 ; -258.3,2009.88 ccw(c-226.74,2050.18) -258.27,2009.86 ; -258.32,2009.9 ccw(c-226.74,2050.18) -258.3,2009.88 ; -258.3,2009.88 ccw(c-200.6,2083.26) -258.29,2009.88 ; -258.29,2009.88 cw(c-272.2,1992.19) -258.27,2009.86 ; -258.27,2009.86 ccw(c-226.74,2050.18) -244.9,2002.33 ; -250.29,421.17 ccw(c-263.44,439.43) -250.24,421.21 ; -250.29,421.17 cw(c-32.84,121) -250.24,421.21 ; -250.24,421.21 ccw(c-263.44,439.43) -250.24,421.21 ; -250.24,421.21 cw(c-77.2,182.31) -239.6,428.57 ; -244.9,2002.33 ccw(c-226.74,2050.18) -244.85,2002.31 cw(c-252.82,1981.26) -244.68,2002.24 ; -244.9,2002.33 cw(c-252.82,1981.26) -244.74,2002.26 ccw(c-217.99,2071.85) -244.68,2002.24 ; -244.68,2002.24 ccw(c-217.99,2071.85) -238.67,2000.23 cw(c-244.92,1978.61) -238.59,2000.2 ; -239.6,428.57 ccw(c-251.99,447.35) -239.52,428.62 ; -239.6,428.57 cw(c-109.86,231.85) -239.52,428.62 ; -239.52,428.62 cw(c-109.86,231.85) -229.59,434.81 ; -238.59,2000.2 ccw(c-210.29,2098.53) -231.5,1998.43 ; -231.5,1998.43 ccw(c-210.29,2098.53) -231.44,1998.42 ; -231.5,1998.43 cw(c-236.09,1976.4) -231.44,1998.42 ; -231.44,1998.42 ccw(c-201.35,2140.8) -222.87,1996.87 ; -231.44,1998.42 ccw(c-236.09,1976.4) -231.44,1998.42 ; -229.59,434.81 ccw(c-240.96,454.23) -229.53,434.85 ; -229.59,434.81 cw(c-109.86,231.85) -229.54,434.85 ; -229.54,434.85 ccw(c-240.96,454.23) -229.53,434.85 ; -229.53,434.85 cw(c-133.49,271.96) -220.09,440.06 ; -222.87,1996.87 ccw(c-191.56,2205.95) -222.8,1996.86 ; -222.87,1996.87 cw(c-226.2,1974.62) -222.8,1996.86 ; -222.8,1996.86 ccw(c-191.56,2205.95) -212.91,1995.62 ; -220.09,440.06 ccw(c-230.33,460.1) -220.03,440.09 ; -220.09,440.06 cw(c-133.49,271.96) -220.03,440.09 ; -220.03,440.09 ccw(c-230.33,460.1) -220.03,440.09 ; -220.03,440.09 cw(c-149.83,303.72) -211.11,444.32 ; -212.91,1995.62 ccw(c-191.56,2205.95) -212.85,1995.62 ; -212.91,1995.62 cw(c-215.12,1973.23) -212.85,1995.62 ; -212.85,1995.62 ccw(c-181.54,2304.37) -201.35,1994.67 ; -212.85,1995.62 ccw(c-215.12,1973.23) -212.85,1995.62 ; -211.11,444.32 ccw(c-220.04,464.98) -211,444.37 cw(c-164.36,338.04) -210.94,444.4 ; -211.11,444.32 cw(c-149.83,303.72) -211.05,444.35 ccw(c-220.04,464.98) -210.94,444.4 ; -210.94,444.4 cw(c-164.36,338.04) -194.49,450.17 ; -201.35,1994.67 ccw(c-181.54,2304.37) -201.28,1994.66 ; -201.35,1994.67 cw(c-202.71,1972.21) -201.28,1994.66 ; -201.28,1994.66 ccw(c-172,2452.84) -201.21,1994.66 ; -201.28,1994.66 cw(c-202.71,1972.21) -201.21,1994.66 ; -201.21,1994.66 ccw(c-172,2452.84) -188.14,1994.01 ; -194.49,450.17 ccw(c-313.61,897.23) -185.4,452.7 ccw(c-191.63,474.32) -185.24,452.74 ; -194.52,450.17 ccw(c-313.61,897.23) -194.49,450.17 ; -188.14,1994.01 ccw(c-172,2452.84) -188.07,1994.01 ; -188.14,1994.01 cw(c-188.86,1971.52) -188.07,1994.01 ; -188.07,1994.01 ccw(c-163.99,2678.24) -188,1994.01 ; -188.07,1994.01 cw(c-188.86,1971.52) -188,1994.01 ; -188,1994.01 ccw(c-163.99,2678.24) -173.13,1993.65 ; -185.24,452.74 -174.83,455.81 ; -185.27,452.73 -185.24,452.74 ; -174.83,455.81 ccw(c-181.17,477.4) -174.57,455.89 ; -174.83,455.81 -174.8,455.82 ccw(c-181.17,477.4) -174.57,455.89 ; -174.57,455.89 -162.6,459.57 ; -173.13,1993.65 cw(c-173.43,1971.15) -173.07,1993.65 ; -173.13,1993.65 cw(c-173.43,1971.15) -173.07,1993.65 ; -162.6,459.57 ccw(c-169.2,481.08) -162.42,459.62 ; -162.6,459.57 ccw(c-169.2,481.08) -162.42,459.62 ; -162.42,459.62 -149.24,463.79 ; -149.24,463.79 ccw(c-156.01,485.24) -149.22,463.79 ; -149.23,463.79 ccw(c-156.01,485.24) -149.14,463.82 ; -149.23,463.79 -149.22,463.79 ; -149.24,463.79 -149.23,463.79 ; -149.22,463.79 ccw(c-156.01,485.24) -149.14,463.82 ; -149.14,463.82 ccw(c-1002.96,3125.03) -89.27,483.78 ; -89.27,483.78 ccw(c-96.62,505.04) -89.11,483.83 ; -89.27,483.78 ccw(c-96.62,505.04) -89.14,483.82 -89.11,483.83 ; -89.11,483.83 -59.45,494.29 ; -59.45,494.29 ccw(c-66.87,515.53) -59.2,494.38 ; -59.45,494.29 -59.39,494.31 ccw(c-66.87,515.53) -59.2,494.38 ; -59.2,494.38 cw(c247.64,-351.16) -20.46,507.45 ; -41.21,1978.9 cw(c-46.51,1957.03) -40.93,1978.83 ; -41.21,1978.9 cw(c-46.51,1957.03) -41,1978.84 ccw(c58.34,2371.55) -40.93,1978.83 ; -40.93,1978.83 ccw(c58.34,2371.55) -17.09,1973.56 ; -20.46,507.45 ccw(c-27.1,528.95) -20.38,507.47 ; -20.46,507.45 cw(c247.64,-351.16) -20.4,507.47 ; -20.38,507.47 cw(c120.9,56.31) 12.72,516.53 ; -20.4,507.47 ccw(c-27.1,528.95) -20.38,507.47 ; -17.09,1973.56 ccw(c4.77,2093.73) -8.62,1972.32 ; -8.62,1972.32 ccw(c4.77,2093.73) -8.56,1972.32 ; -8.62,1972.32 cw(c-11.01,1949.95) -8.56,1972.32 ; -8.56,1972.32 ccw(c-1.17,2039.81) -1.69,1971.91 ccw(c-1.42,2020.55) 4.17,1972.24 ; 4.13,1972.23 ccw(c-1.76,2022.19) 4.2,1972.24 ; 4.17,1972.24 cw(c6.76,1949.88) 4.2,1972.24 ; 12.72,516.53 ccw(c7.57,538.44) 12.81,516.55 ; 12.72,516.53 ccw(c7.57,538.44) 12.75,516.54 cw(c71.64,267.19) 12.81,516.55 ; 12.81,516.55 cw(c71.64,267.19) 40.48,521.5 ; 25.41,1978.6 ccw(c-89.38,2248.83) 35.89,1983.3 ; 25.41,1978.6 ccw(c34.2,1957.89) 25.4,1978.6 ; 25.41,1978.6 ccw(c34.2,1957.89) 25.4,1978.6 ; 27.81,-119.82 cw(c50.13,-122.68) 27.82,-119.75 ; 27.81,-119.82 cw(c50.13,-122.68) 27.82,-119.75 ; 27.82,-119.75 cw(c500.86,-181.73) 44.74,-41.88 ; 31.15,-279.51 cw(c53.41,-276.28) 31.14,-279.47 ; 31.15,-279.51 ccw(c1282.22,-101.76) 38.69,-326.31 ccw(c1854.89,0.6) 48.63,-377.36 ; 31.15,-279.51 cw(c1282.22,-101.76) 31.14,-279.44 ; 35.9,1983.3 ccw(c-292.98,2681.63) 35.96,1983.33 ; 35.89,1983.3 cw(c45.49,1962.95) 35.96,1983.33 ; 35.9,1983.3 ccw(c45.49,1962.95) 35.89,1983.3 ; 35.96,1983.33 ccw(c-292.98,2681.63) 48.68,1989.46 ; 40.48,521.5 ccw(c37.82,543.84) 40.57,521.51 ; 40.48,521.5 cw(c71.64,267.19) 40.55,521.51 ; 40.57,521.51 cw(c58.31,377.23) 40.63,521.52 ; 40.55,521.51 ccw(c37.82,543.84) 40.63,521.52 ; 40.63,521.52 cw(c58.31,377.23) 63.42,522.51 ; 44.74,-41.88 cw(c652.75,-226.82) 58.86,-0.6 ; 48.63,-377.36 ccw(c70.65,-372.75) 48.63,-377.37 ; 48.68,1989.46 cw(c58.64,1969.29) 48.77,1989.51 ; 48.68,1989.46 cw(c58.64,1969.29) 48.71,1989.48 cw(c174.51,1733.57) 48.77,1989.51 ; 58.86,-0.6 cw(c877.48,-312.45) 77.08,43.58 cw(c1268.59,-486.2) 99.69,91.75 cw(c1954.27,-824.71) 126.98,145.02 cw(c3206.16,-1488.21) 159.28,204.52 ; 58.86,-0.6 ccw(c79.89,-8.61) 58.86,-0.6 ; 63.42,522.51 ccw(c64.28,544.99) 63.71,522.5 ; 63.42,522.51 cw(c58.31,377.23) 63.48,522.5 ccw(c64.28,544.99) 63.71,522.5 ; 63.71,522.5 cw(c61.6,440.82) 98.27,513.83 cw(c58.81,437.9) 113.22,503.95 ; 113.22,503.95 ccw(c127.58,521.27) 113.24,503.93 cw(c31.05,404.58) 113.29,503.89 ; 113.22,503.95 cw(c58.81,437.9) 113.26,503.91 ccw(c127.58,521.27) 113.29,503.89 ; 113.29,503.89 cw(c31.05,404.58) 128.4,489.13 cw(c-105.74,291.99) 160.91,442.28 ; 118.12,2011.79 ccw(c122.87,1954.5) 118.08,2011.79 ; 118.12,2011.79 cw(c122.87,1954.5) 125.81,2011.91 ; 159.28,204.52 cw(c178.95,193.59) 159.36,204.66 ; 159.28,204.52 cw(c178.95,193.59) 159.33,204.6 ccw(c-50.46,322.32) 159.36,204.66 ; 159.36,204.66 ccw(c-50.46,322.32) 169.46,224.83 ; 160.91,442.28 ccw(c180.51,453.33) 161.11,441.92 cw(c-198.57,230.26) 161.15,441.86 ; 160.91,442.28 ccw(c180.51,453.33) 161.15,441.86 ; 161.15,441.86 cw(c-198.57,230.26) 167.59,430.51 ; 167.62,430.45 cw(c-24.63,325.29) 167.65,430.4 ; 167.62,430.46 ccw(c187.36,441.25) 167.65,430.4 ; 167.62,430.45 cw(c187.36,441.25) 167.59,430.51 ; 167.62,430.46 ccw(c-198.57,230.26) 167.59,430.51 ; 167.65,430.4 cw(c-24.63,325.29) 172.74,420.5 ; 169.46,224.83 ccw(c20.45,290.1) 173.23,234.21 ; 172.1,1976.44 cw(c-37.05,1824.81) 172.14,1976.39 ; 172.11,1976.44 cw(c153.89,1963.24) 172.14,1976.39 ; 172.14,1976.39 cw(c-37.05,1824.81) 177.57,1968.61 ; 172.74,420.5 ccw(c193.03,430.22) 172.85,420.27 cw(c73.13,371.09) 172.88,420.21 ; 172.74,420.5 cw(c-24.63,325.29) 172.76,420.45 ccw(c193.03,430.22) 172.88,420.21 ; 172.88,420.21 cw(c73.13,371.09) 181.91,394.08 ; 173.23,234.21 ccw(c23.35,288.38) 180.88,264.24 ; 177.57,1968.6 ccw(c158.87,1956.08) 177.57,1968.61 ; 177.57,1968.6 cw(c-61.25,1808.66) 193.07,1942.6 ; 180.88,264.24 cw(c203.13,260.93) 180.91,264.45 ccw(c-62.02,302.88) 182.52,276.56 ; 181.91,394.08 cw(c56.13,368.16) 183.53,384.39 ; 182.52,276.56 cw(c204.89,274.15) 182.53,276.65 ; 182.52,276.56 ccw(c204.89,274.15) 182.52,276.56 ; 182.52,276.56 ccw(c-169.04,314.41) 182.53,276.65 ; 182.53,276.65 ccw(c-169.04,314.41) 183.72,290.19 ; 183.54,384.27 cw(c205.86,387.16) 183.54,384.33 ; 183.54,384.27 ccw(c-3.67,360.63) 183.53,384.33 ; 183.54,384.27 cw(c-3.67,360.63) 184.63,372.92 ; 183.53,384.34 cw(c205.86,387.16) 183.53,384.39 ; 183.54,384.33 ccw(c56.13,368.16) 183.53,384.39 ; 183.72,290.19 cw(c206.17,288.75) 183.72,290.28 ; 183.72,290.19 ccw(c-169.04,314.41) 183.72,290.28 ; 183.72,290.28 ccw(c206.17,288.75) 183.72,290.28 ; 183.72,290.28 ccw(c-357.4,327.36) 184.57,305.91 ; 184.57,305.92 ccw(c-698.07,341) 184.57,305.98 ; 184.57,305.91 cw(c207.05,305.02) 184.57,305.98 ; 184.57,305.92 ccw(c207.05,305.02) 184.57,305.91 ; 184.57,305.98 ccw(c-698.07,341) 185.1,323.72 ; 184.64,372.79 cw(c207.09,374.32) 184.63,372.86 ; 184.64,372.79 ccw(c-129.95,352.38) 184.63,372.86 ; 184.64,372.79 cw(c-129.95,352.38) 185.22,359.23 ; 184.63,372.86 cw(c207.09,374.32) 184.63,372.92 ; 184.63,372.86 ccw(c-3.67,360.63) 184.63,372.92 ; 185.1,323.72 cw(c207.59,323.28) 185.1,323.91 ; 185.1,323.72 cw(c207.59,323.28) 185.1,323.84 ccw(c-637.73,344.43) 185.1,323.91 ; 185.1,323.91 ccw(c-637.73,344.43) 185.36,344.43 ccw(c-637.73,344.43) 185.22,359.23 ; 193.07,1942.6 cw(c-61.25,1808.66) 193.1,1942.54 ; 193.07,1942.6 cw(c173.19,1932.06) 193.1,1942.53 ; 193.1,1942.53 ccw(c173.19,1932.06) 193.1,1942.54 ; 193.1,1942.53 213.99,1902.8 325.5,1896.25 ; 325.5,1896.25 cw(c324.18,1873.78) 325.65,1896.24 ; 325.5,1896.25 cw(c324.18,1873.78) 325.65,1896.24 ; 325.65,1896.24 cw(c239.14,572.97) 843.24,1753.47 ; 592.49,-1002.8 ccw(c596.51,-980.66) 592.52,-1002.8 ; 592.52,-1002.8 619.3,-1007.63 ; 619.3,-1007.63 ccw(c623.29,-985.49) 619.41,-1007.65 ; 619.3,-1007.63 ccw(c623.29,-985.49) 619.41,-1007.65 ; 794.31,-1006.85 ccw(c707.79,-542.32) 926.11,-961.38 ; 868.76,-579.62 ccw(c1172.51,-574.64) 876.46,-642.79 ; 868.76,-579.62 cw(c1172.51,-574.64) 868.76,-579.55 ccw(c846.26,-579.92) 868.75,-579.26 ; 868.76,-579.62 ccw(c846.26,-579.92) 868.75,-579.32 cw(c1070.68,-573.99) 868.75,-579.26 ; 868.75,-579.26 cw(c1070.68,-573.99) 887.42,-489.03 ; 876.46,-642.79 ccw(c1094.14,-591.61) 878.79,-651.86 ; 878.79,-651.86 ccw(c1094.14,-591.61) 878.81,-651.92 cw(c857.14,-657.99) 878.83,-651.99 ; 878.79,-651.86 cw(c857.14,-657.99) 878.81,-651.93 ccw(c1051.15,-603.71) 878.83,-651.99 ; 878.83,-651.99 ccw(c1051.15,-603.71) 881.35,-660.21 ; 881.37,-660.28 ccw(c860.02,-667.39) 881.35,-660.21 ; 881.37,-660.28 ccw(c1008.18,-618.09) 884.06,-667.62 ; 881.37,-660.28 ccw(c860.02,-667.39) 881.37,-660.27 cw(c1051.15,-603.71) 881.35,-660.21 ; 884.06,-667.62 cw(c863.16,-675.96) 884.08,-667.69 ; 884.06,-667.62 cw(c863.16,-675.96) 884.06,-667.63 ccw(c968.82,-633.86) 884.08,-667.69 ; 884.08,-667.69 ccw(c968.82,-633.86) 886.73,-673.69 ; 886.73,-673.69 ccw(c968.82,-633.86) 886.75,-673.72 ; 886.74,-673.7 ccw(c866.52,-683.58) 886.73,-673.69 ; 886.74,-673.7 886.75,-673.72 ; 886.75,-673.72 899.84,-700.5 955.22,-699.82 ; 887.42,-489.03 cw(c1081.58,-580.43) 903.12,-461.26 ; 903.12,-461.26 ccw(c884.46,-448.68) 903.16,-461.19 ; 903.12,-461.26 cw(c1081.58,-580.43) 903.17,-461.18 ; 903.16,-461.19 cw(c1121.72,-607.44) 924.4,-433.59 ; 924.4,-433.59 cw(c1184.37,-662.69) 924.45,-433.54 ; 924.4,-433.59 ccw(c907.52,-418.72) 924.45,-433.54 ; 924.45,-433.54 cw(c1184.37,-662.69) 951.56,-406.04 ; 926.11,-961.38 ccw(c685.84,-500.61) 1041.8,-879.2 ; 926.11,-961.38 ccw(c915.71,-941.42) 926.11,-961.38 ; 951.56,-406.04 cw(c1271.94,-759.09) 951.61,-406 ; 951.56,-406.04 ccw(c936.44,-389.38) 951.61,-406 ; 951.61,-406 cw(c1271.94,-759.09) 984.93,-378.42 ; 955.22,-699.82 cw(c955.53,-722.32) 955.4,-699.82 ccw(c953.25,-344.79) 955.46,-699.82 ; 955.22,-699.82 955.26,-699.82 cw(c955.53,-722.32) 955.46,-699.82 ; 955.46,-699.82 ccw(c953.25,-344.79) 994.11,-697.47 ; 984.93,-378.42 ccw(c971.44,-360.41) 984.99,-378.38 ; 984.93,-378.42 cw(c1271.94,-759.09) 984.98,-378.38 ; 984.99,-378.38 cw(c1388.68,-913.66) 1024.94,-350.47 ; 984.98,-378.38 ccw(c971.44,-360.41) 984.99,-378.38 ; 994.11,-697.47 ccw(c966.78,-471.85) 1010.84,-694.81 ; 1010.84,-694.81 ccw(c966.78,-471.85) 1010.91,-694.8 ; 1010.84,-694.81 cw(c1015.28,-716.87) 1010.9,-694.8 ; 1010.9,-694.8 ccw(c973.43,-505.92) 1010.96,-694.78 ; 1010.91,-694.8 cw(c1015.28,-716.87) 1010.96,-694.78 ; 1010.96,-694.78 ccw(c973.43,-505.92) 1026.65,-690.98 cw(c1032.87,-712.6) 1026.67,-690.97 ; 1024.94,-350.47 cw(c1636.5,-1306.42) 1125.31,-293.24 ; 1024.95,-350.46 ccw(c1388.68,-913.66) 1024.94,-350.47 ; 1026.67,-690.97 ccw(c973.73,-508.38) 1056.91,-679.33 ; 1041.8,-879.2 ccw(c1026.39,-862.8) 1041.82,-879.17 ; 1041.8,-879.2 ccw(c1026.39,-862.8) 1041.82,-879.17 ; 1041.82,-879.17 ccw(c639.52,-452.55) 1160.76,-721.2 ; 1056.91,-679.33 cw(c1066.82,-699.53) 1057,-679.28 ccw(c951.45,-461.78) 1072.66,-670.96 ; 1072.66,-670.96 cw(c1083.95,-690.43) 1072.72,-670.93 ; 1072.66,-670.96 ccw(c911.24,-392.47) 1072.72,-670.93 ; 1072.72,-670.93 ccw(c911.24,-392.47) 1089.22,-660.68 ; 1089.22,-660.68 cw(c1101.66,-679.43) 1089.28,-660.64 ; 1089.22,-660.68 ccw(c833.74,-275.63) 1089.28,-660.64 ; 1089.22,-660.68 ccw(c1101.66,-679.43) 1089.22,-660.68 ; 1089.28,-660.64 ccw(c833.74,-275.63) 1107,-648.28 ; 1107,-648.28 cw(c1120.36,-666.38) 1107.05,-648.23 ; 1107,-648.28 ccw(c833.74,-275.63) 1107.05,-648.24 ; 1107.05,-648.23 ccw(c1120.36,-666.38) 1107.05,-648.24 ; 1107.05,-648.23 ccw(c689.83,-79.23) 1126.48,-633.47 ; 1125.31,-293.24 ccw(c1115.17,-273.15) 1125.41,-293.19 ; 1125.31,-293.24 ccw(c1115.17,-273.15) 1125.41,-293.19 ; 1126.49,-633.46 cw(c1393.15,-972.26) 1139.85,-623.36 ; 1126.49,-633.46 ccw(c1140.4,-651.14) 1126.48,-633.47 ; 1126.49,-633.46 ccw(c1140.4,-651.14) 1126.48,-633.47 ; 1139.86,-623.35 ccw(c1153.07,-641.56) 1139.85,-623.36 ; 1157.14,-611.75 ccw(c1217.15,-710.85) 1157.13,-611.76 ; 1157.14,-611.75 cw(c1217.15,-710.85) 1162.09,-608.92 ; 1157.15,-611.74 ccw(c1251.11,-767.2) 1157.14,-611.75 ; 1160.76,-721.2 ccw(c1140.76,-710.89) 1160.78,-721.14 ; 1160.76,-721.2 ccw(c1140.76,-710.89) 1160.78,-721.14 ; 1160.78,-721.14 1173.33,-696.64 ; 1162.09,-608.92 cw(c1194.11,-667.92) 1166.93,-606.53 ; 1162.12,-608.9 ccw(c1217.15,-710.85) 1162.09,-608.92 ; 1173.34,-696.63 ccw(c1153.31,-686.37) 1173.46,-696.4 ; 1173.33,-696.64 ccw(c1153.31,-686.37) 1173.44,-696.43 1173.46,-696.4 ; 1173.33,-696.64 1173.34,-696.63 ; 1173.46,-696.4 1179.13,-685.03 ; 1179.13,-685.03 ccw(c1159.02,-674.94) 1179.22,-684.86 ; 1179.13,-685.03 1179.15,-685 ccw(c1159.02,-674.94) 1179.22,-684.86 ; 1179.22,-684.86 1184.44,-674.22 ; 1184.44,-674.22 ccw(c1164.24,-664.3) 1184.53,-674.05 ; 1184.44,-674.22 ccw(c1164.24,-664.3) 1184.53,-674.03 ; 1184.53,-674.03 1189.16,-664.39 ; 1184.53,-674.05 1184.53,-674.03 ; 1189.16,-664.39 ccw(c1168.89,-654.63) 1189.27,-664.17 1189.29,-664.13 ; 1189.17,-664.38 ccw(c1168.89,-654.63) 1189.29,-664.13 ; 1189.16,-664.39 1189.17,-664.38 ; 1189.29,-664.13 1193.25,-655.67 ; 1193.26,-655.64 ccw(c1172.88,-646.1) 1193.4,-655.34 ; 1193.25,-655.67 ccw(c1172.88,-646.1) 1193.4,-655.34 ; 1193.25,-655.67 1193.26,-655.64